# Altium PCB comparator_mezzanine.PcbDoc
Units mil, origin at the board's own origin, x right, y up, seen from the top; angles counter-clockwise.
Board outline 2200 x 2200 mil, 4 copper layers (Top Layer, Signal Layer 1, Signal Layer 2, Bottom Layer), stack 30.634 mil thick; 36 components, 58 nets, 259 pads, 51 vias.
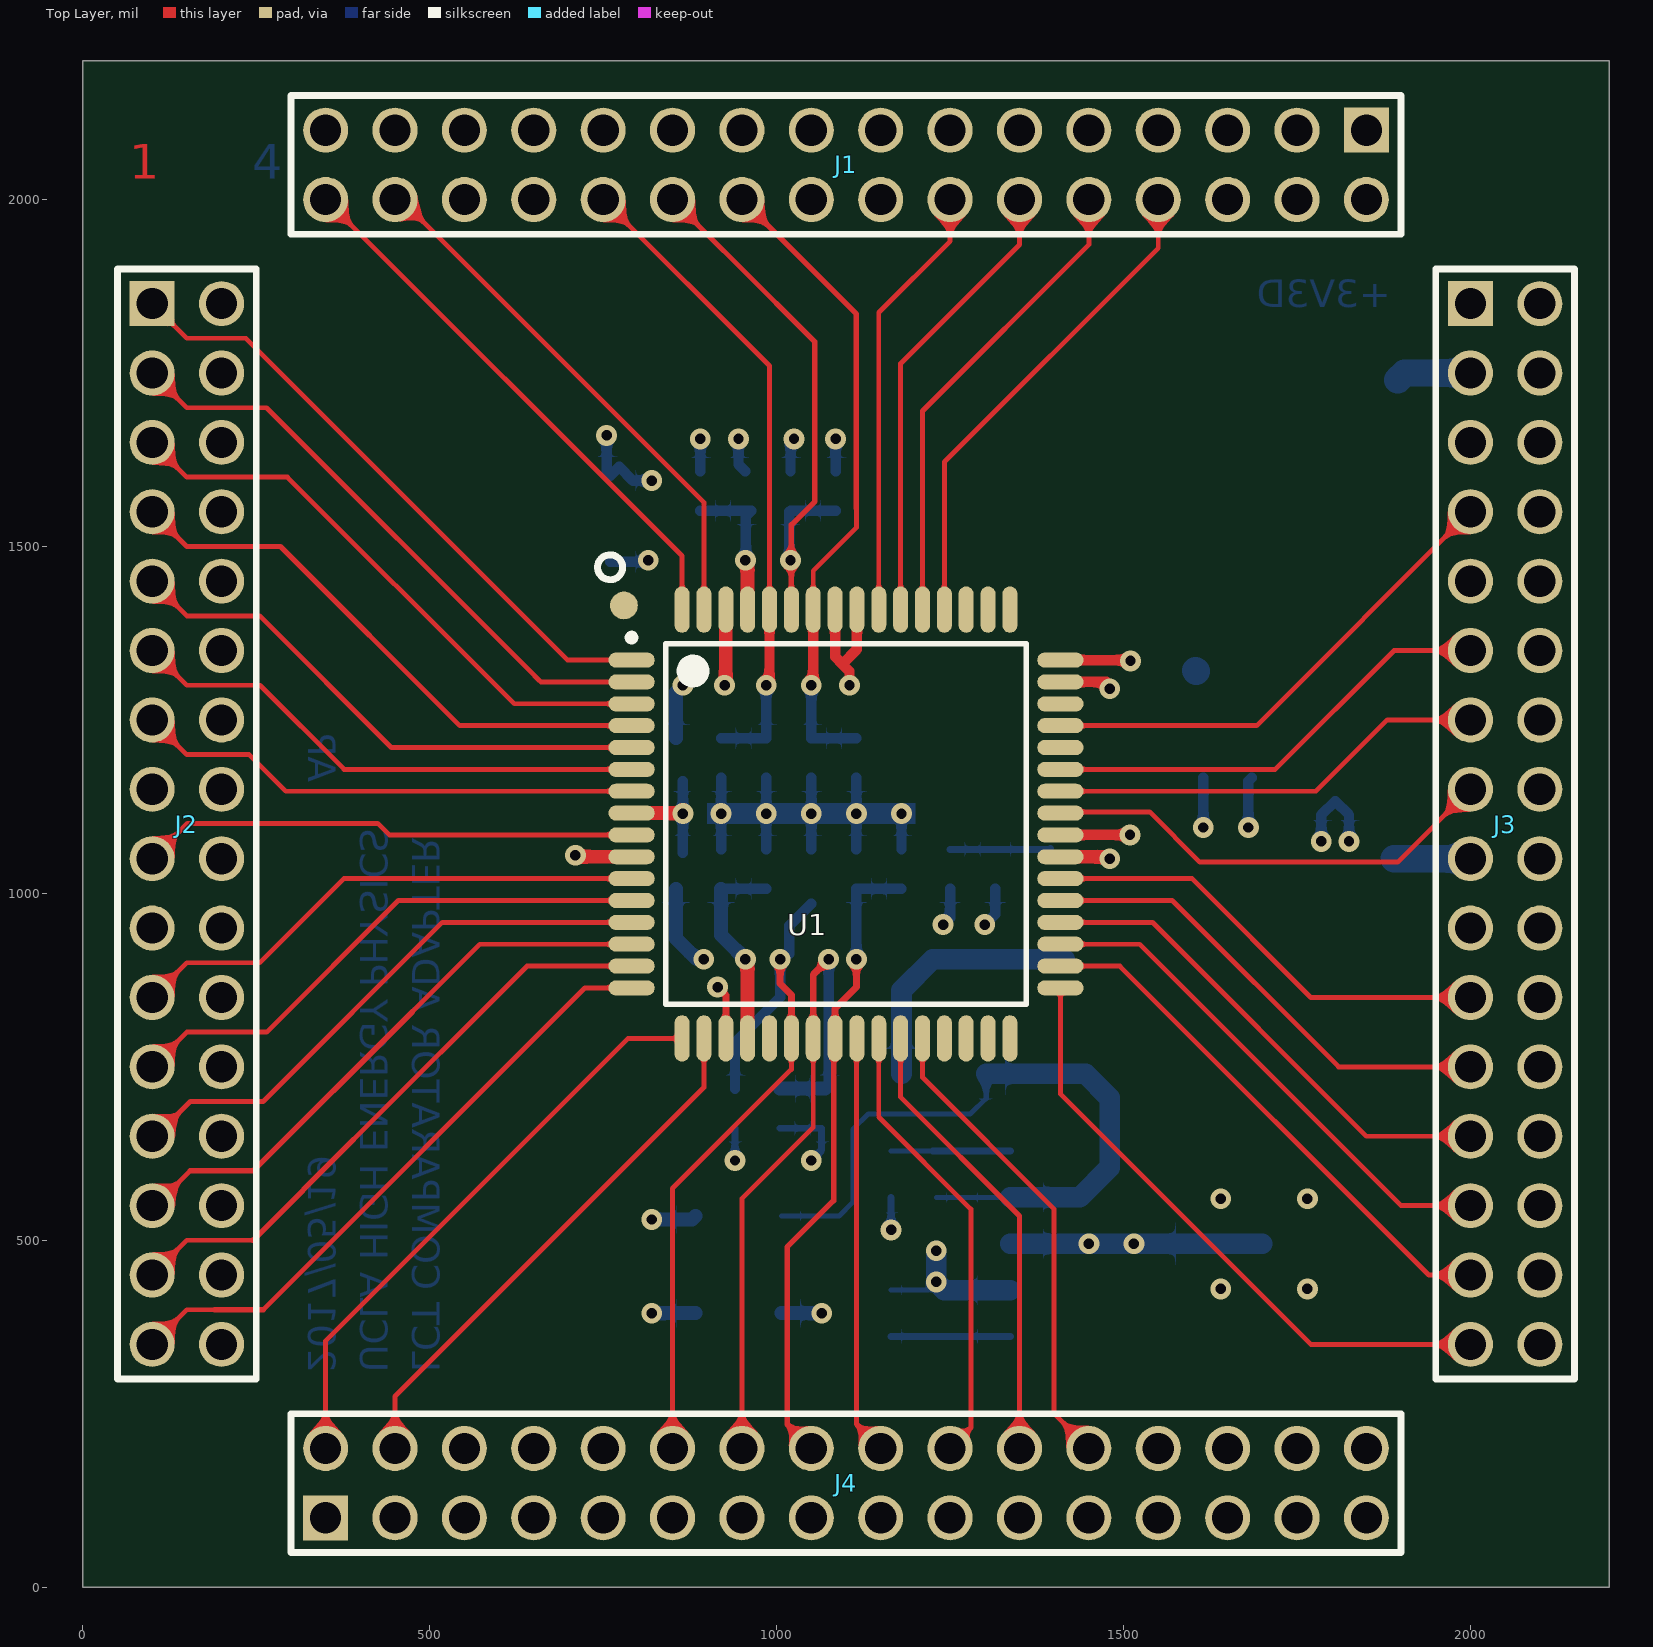
[diagram p0: Top Layer view]
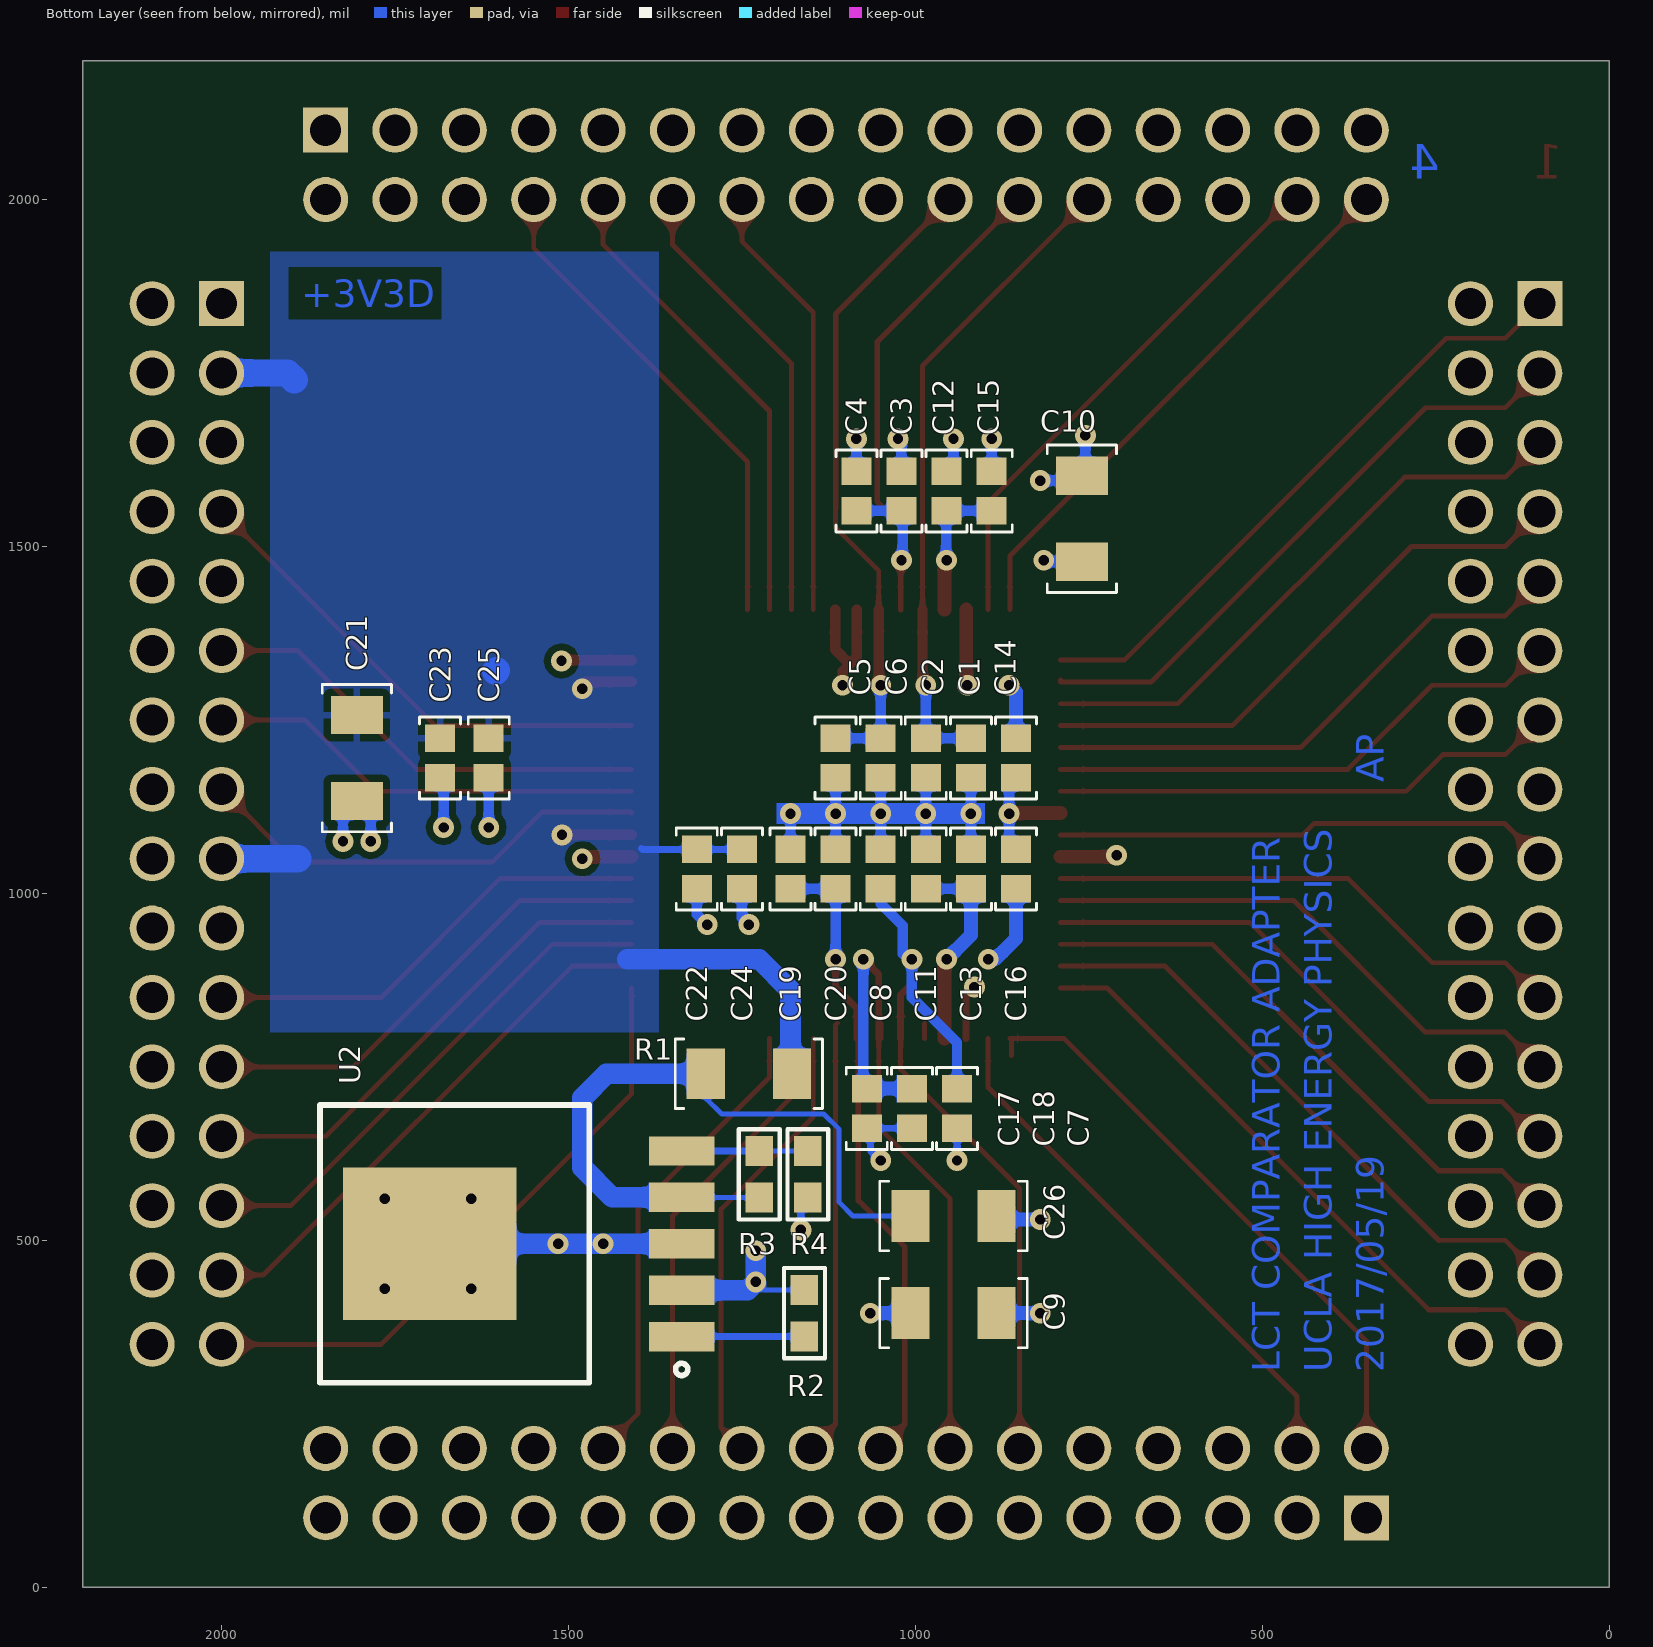
[diagram p1: Bottom Layer view, seen from below]
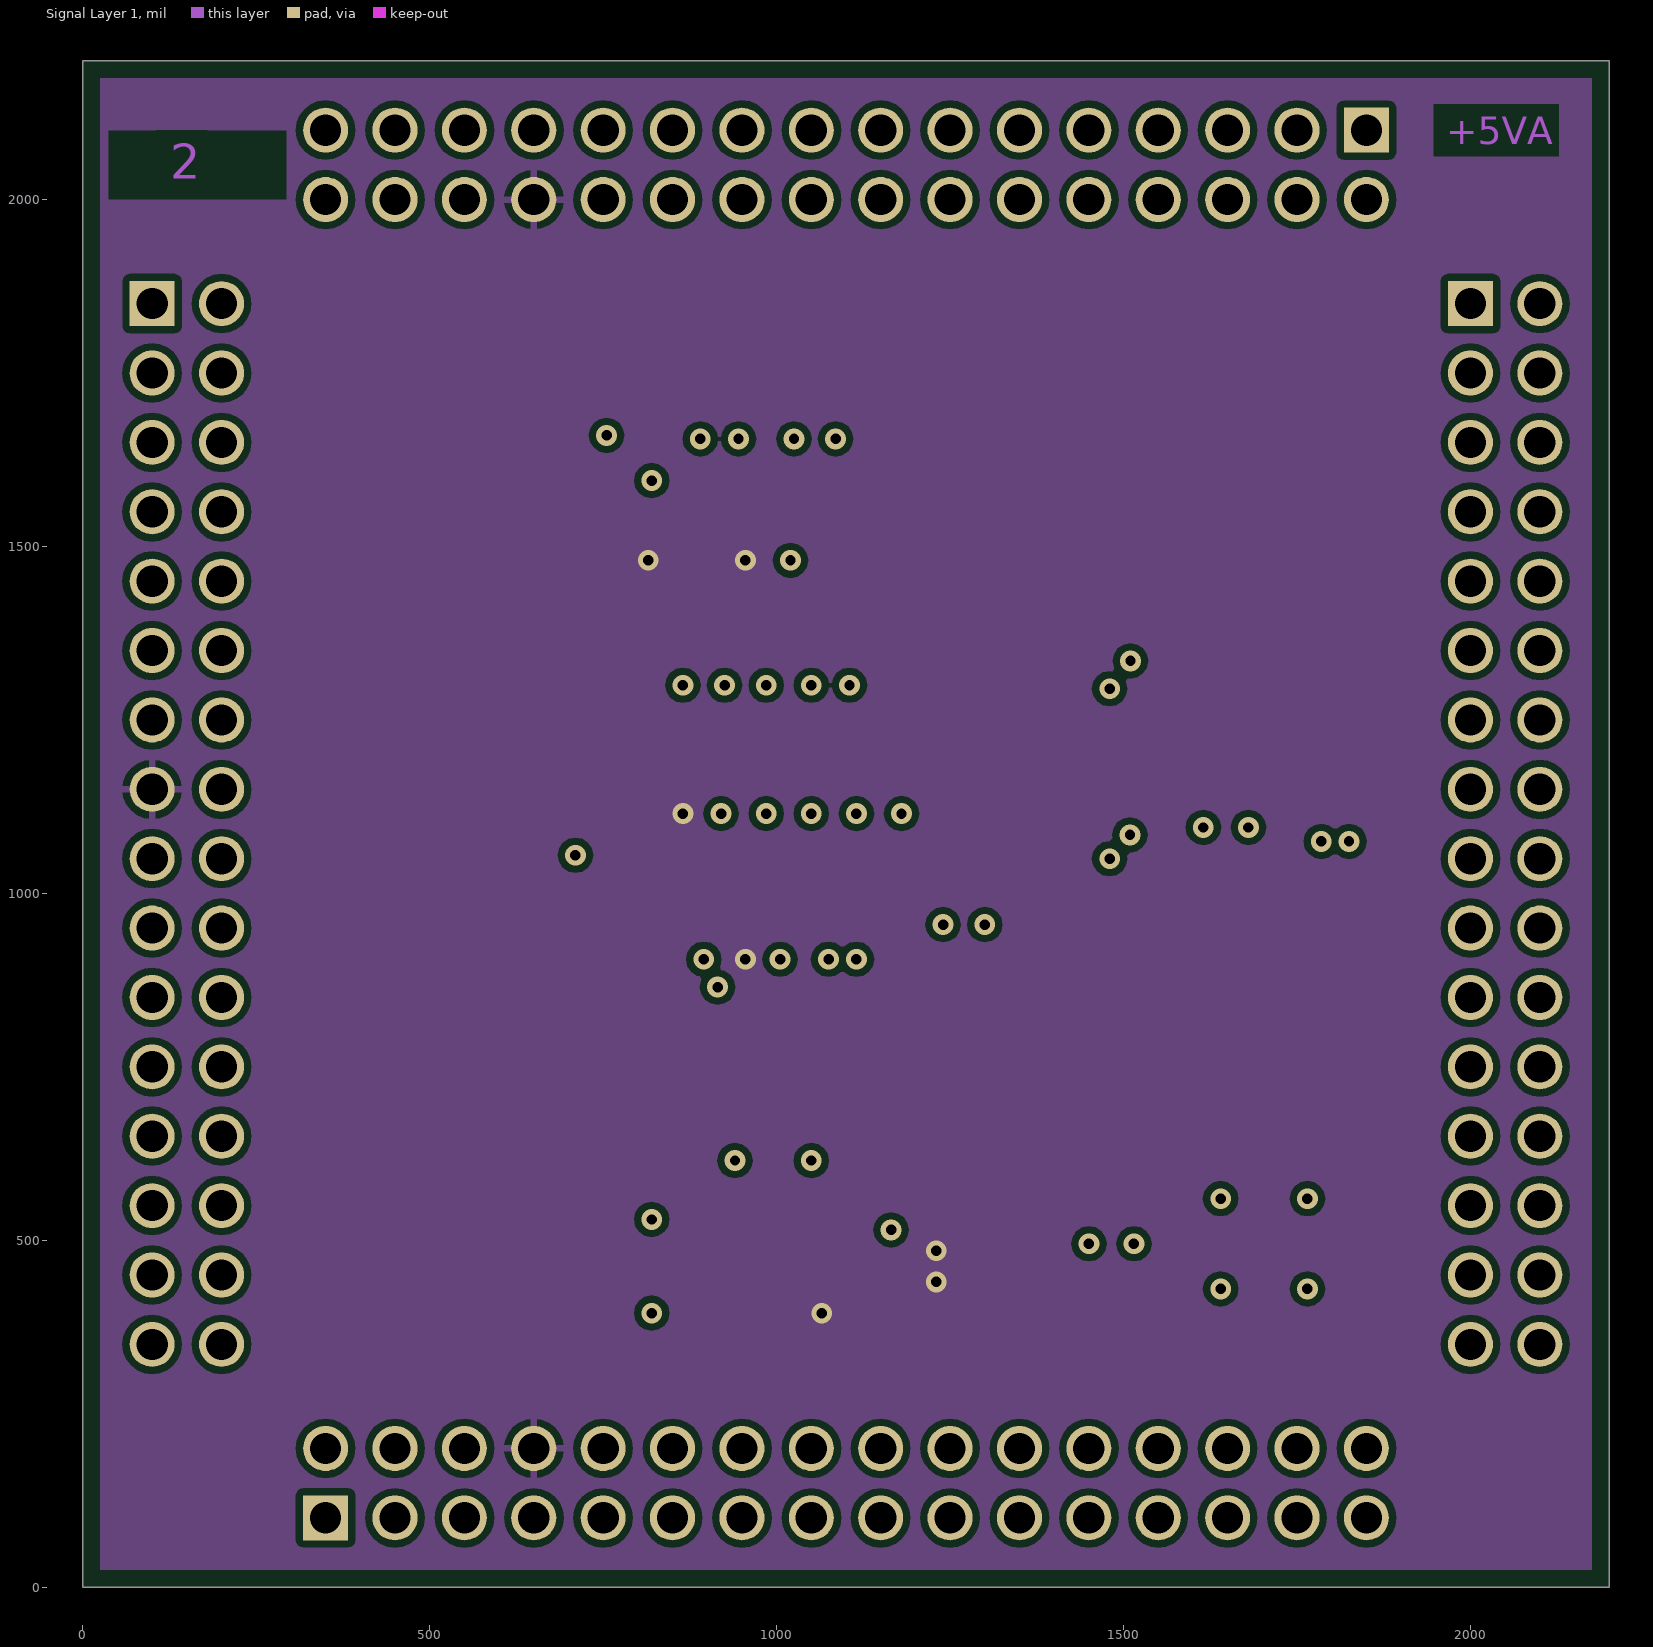
[diagram p2: Signal Layer 1]
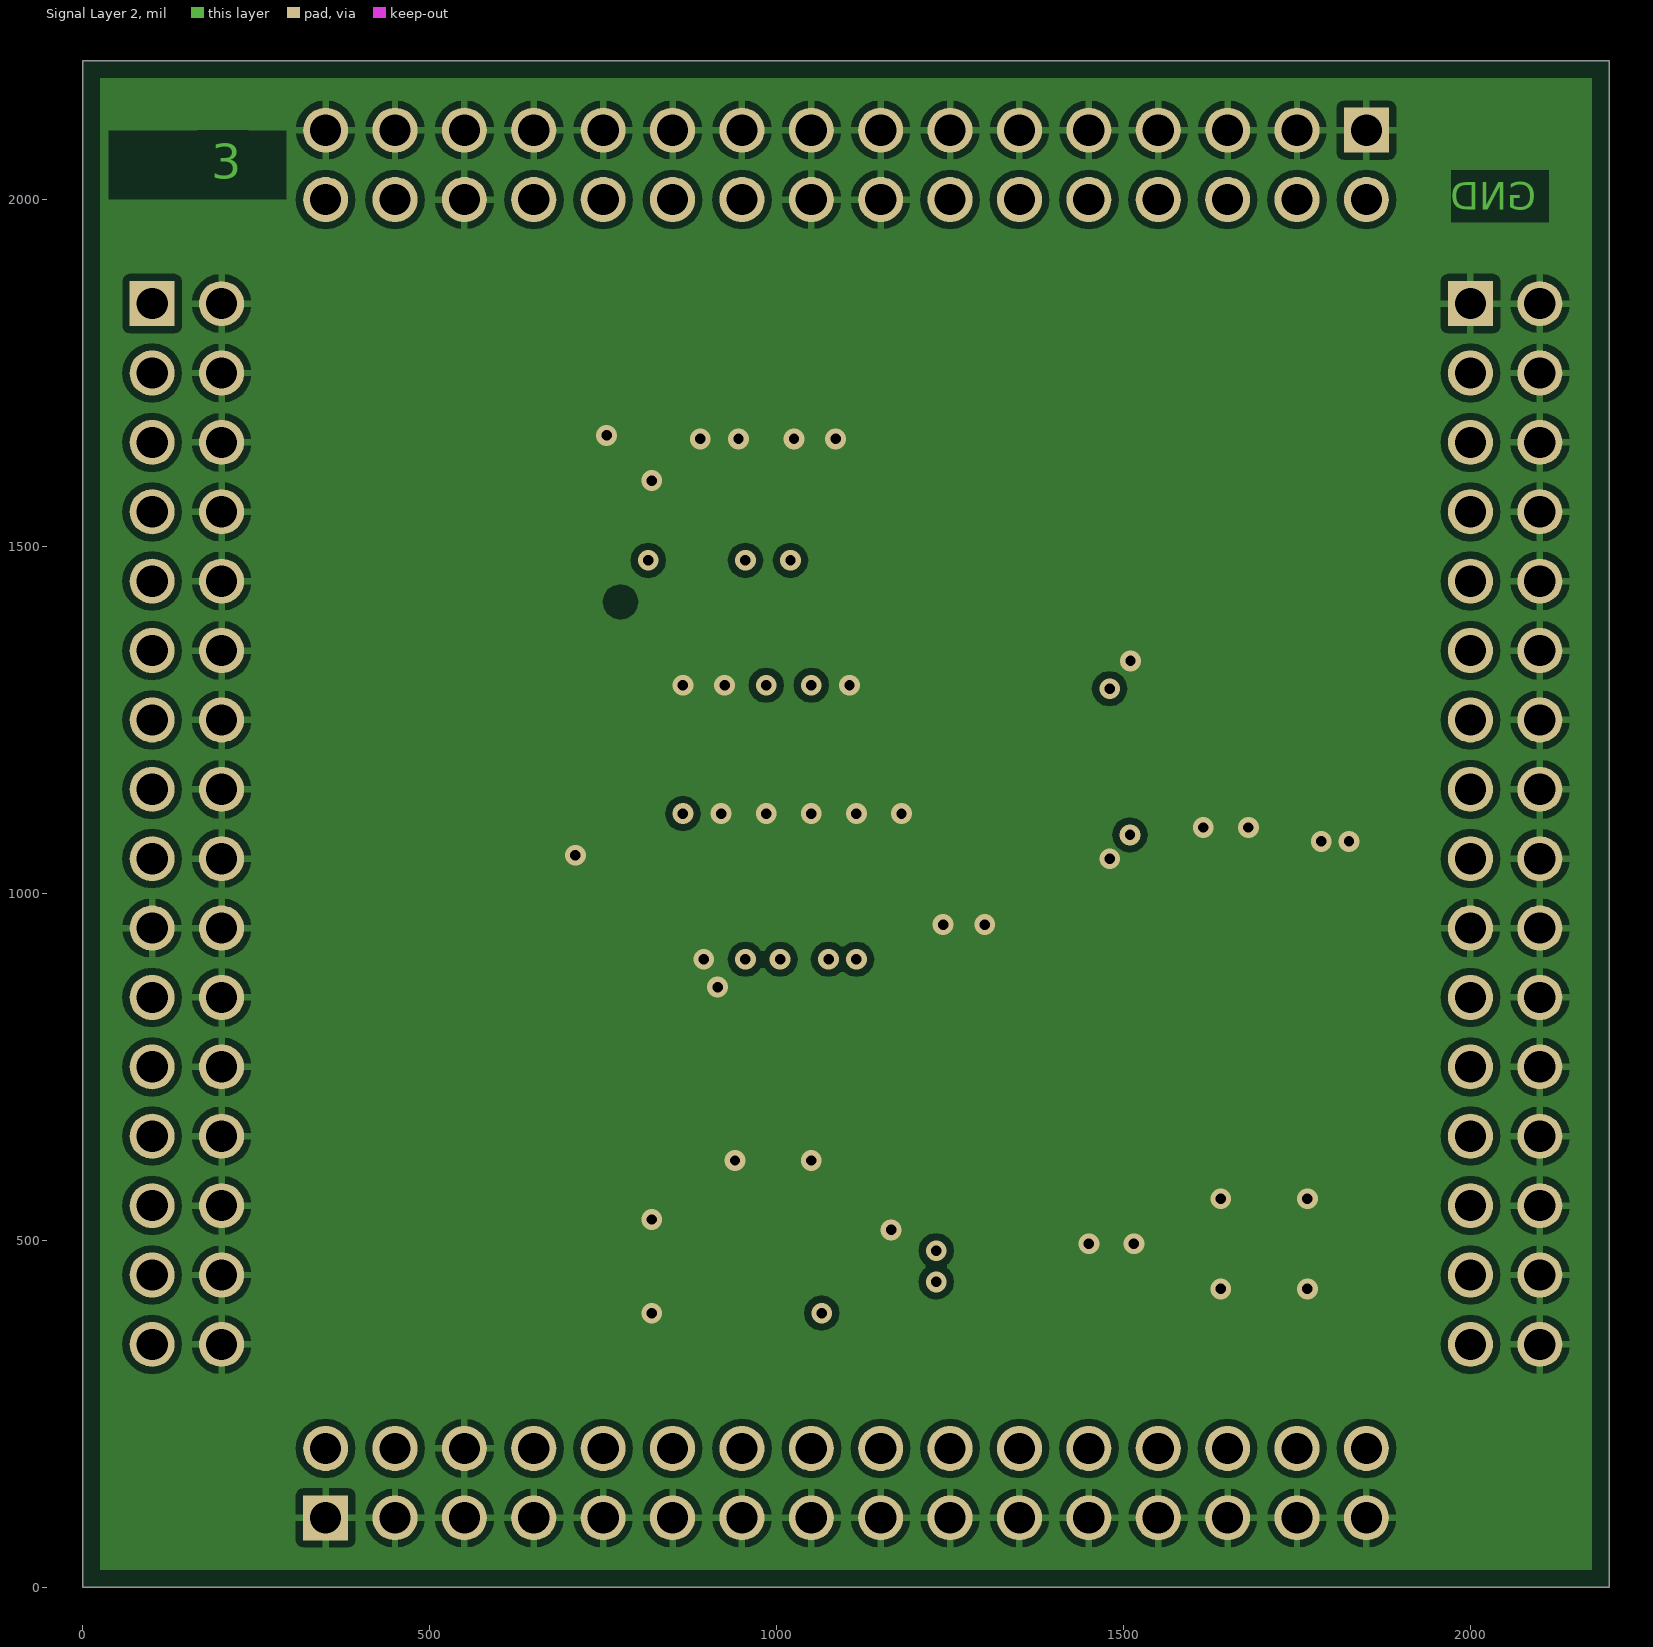
[diagram p3: Signal Layer 2]
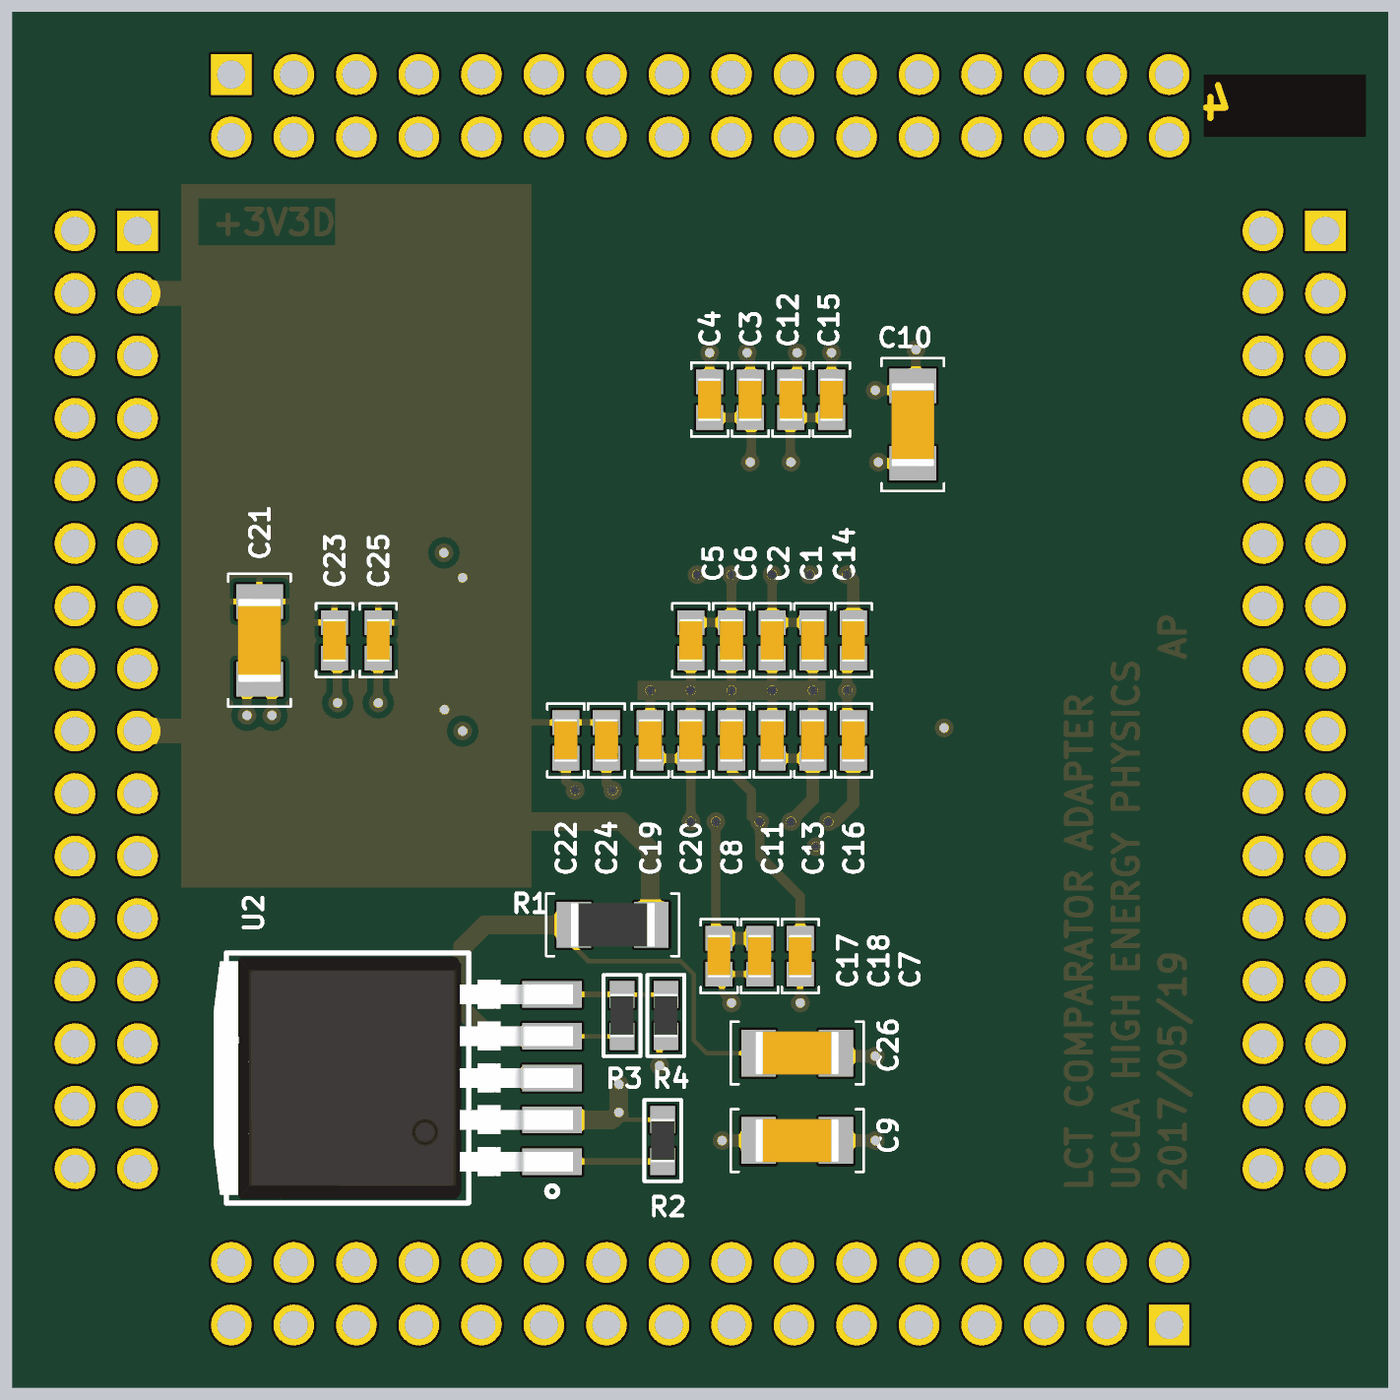
[diagram p4: 3D render of the assembled board from below, using the file's embedded part models]

## Layer stack, top to bottom
Top Solder: solder mask 0.4, Solder Resist, Dk 3.5
Top Layer: signal copper 1.4
Dielectric 1: core 10, FR-4, Dk 4.2
Signal Layer 1: signal copper 1.417
Dielectric 3: prepreg 5, Dk 4.2
Signal Layer 2: signal copper 1.417
Dielectric 2: core 10, Dk 4.2
Bottom Layer: signal copper 1.4
Bottom Solder: solder mask 0.4, Solder Resist, Dk 3.5

## Board outline
0,0 2200,0 2200,2200 0,2200

## Design rules (kind name [scope] priority, off if disabled: settings)
Clearance [All] p1: gap=9.84 ignorepadtopadclearanceinfootprint=FALSE
MinimumAnnularRing [All] p1: minimumring=6
MinimumSolderMaskSliver [All] p1: minsoldermaskwidth=1.5
PolygonConnect ViaConnect [IsVia] p1: connectstyle=Direct reliefconductorwidth=10 reliefentries=4 polygonreliefangle="90 Angle" airgapwidth=10
PolygonConnect [All] p2: connectstyle=Relief reliefconductorwidth=10 reliefentries=4 polygonreliefangle="90 Angle" airgapwidth=10
RoutingVias [All] p1: holewidth=15 width=30 viastyle="Through Hole" minholewidth=15 minwidth=30 maxholewidth=15 maxwidth=30
SilkToSolderMaskClearance [IsPad] p1: minsilkscreentomaskgap=5.91 clearancetoexposedcopper=TRUE
SolderMaskExpansion [All] p1: expansion=4
Width [All] p1: maxlimit=39.37 minlimit=7 preferedwidth=10 midlayer1_minwidth=10 midlayer2_minwidth=10 minimp=50.000000 maximp=50.000000 favimp=50.000000
28 further rules are at their usual default settings.

## Classes and differential pairs
component class comparator_mezzanine: C2 C3 C4 C5 C6 C7 C8 C9 C10 C11 C12 C13 C14 C15 C16 C17 C18 C19 C20 C21 C22 C23 C24 C25 C26 J1 J2 J3 J4 R1 R2 R3 R4 U2

## Components (designator, comment, footprint, x,y, rotation, side; value= is the part's Value field where it differs from the comment)
C1 "1uF" C0603 920,1195 r90 bottom
C2 "0.1uF" C0603 985,1195 r90 bottom
C3 "1uF" C0603 1020,1580 r270 bottom
C4 "0.1uF" C0603 1085,1580 r270 bottom
C5 "1uF" C0603 1115,1195 r90 bottom
C6 "0.1uF" C0603 1050,1195 r90 bottom
C7 "1uF" C0603 940,690 r90 bottom
C8 "0.1uF" C0603 1050,1035 r270 bottom
C9 "10uF" c1206 945,395 r180 bottom
C10 "10uF" c1206 760,1540 r90 bottom
C11 "0.1uF" C0603 985,1035 r270 bottom
C12 "1uF" C0603 955,1580 r270 bottom
C13 "0.1uF" C0603 920,1035 r270 bottom
C14 "1uF" C0603 855,1195 r270 bottom
C15 "0.1uF" C0603 890,1580 r270 bottom
C16 "1uF" C0603 855,1035 r90 bottom
C17 "1uF" C0603 1070,690 r90 bottom
C18 "0.1uF" C0603 1005,690 r90 bottom
C19 "1uF" C0603 1180,1035 r270 bottom
C20 "0.1uF" C0603 1115,1035 r270 bottom
C21 "10uF" c1206 1805,1195 r270 bottom
C22 "0.1uF" C0603 1315,1035 r90 bottom
C23 "1uF" C0603 1685,1195 r90 bottom
C24 "0.1uF" C0603 1250,1035 r90 bottom
C25 "1uF" C0603 1615,1195 r90 bottom
C26 "10uF" c1206 945,535 r180 bottom
J1 "HEADER 16x02" "HEADER 16X02" 1850,2100 r270 top
J2 "HEADER 16x02" "HEADER 16X02" 100,1850 r0 top
J3 "HEADER 16x02" "HEADER 16X02" 2000,1850 r0 top
J4 "HEADER 16x02" "HEADER 16X02" 350,100 r90 top
R1 "Value" R1206 1240,740 r180 bottom
R2 "4.7k" MC_S6/SM/R_0603_IPC 1160,395 r270 bottom
R3 "4.7k" MC_S6/SM/R_0603_IPC 1225,595 r90 bottom
R4 "4.7k" MC_S6/SM/R_0603_IPC 1155,595 r270 bottom
U1 "UCLA/LCT_COMP" "TQFP-64 14x14mm" 1100,1100 r0 top locked
U2 "LP38501ATJ-ADJ" MC_S6/SM/TO263_THIN 1336.81,361.14 r90 bottom

## Footprints (in the part's own frame and the unit in brackets; to place one, negate y for a bottom-side part, rotate by r counter-clockwise, add the part's x,y. Pads: shape width x height; smd on the part's side, far side on the other; paste and mask are expansions set on the pad)
C0603 [mm] "Chip Capacitor, 2-Leads, Body 1.60x0.85mm, IPC Low Density"
  rect 1x1.1 smd: 1(-0.725,0) 2(0.725,0)
  silkscreen extent -1.5,-0.75 1.5,0.75, body extent -0.87,-0.48 0.87,0.48, height 0.55
c1206 [mm] "Chip Capacitor, 2-Leads, Body 3.27x1.60mm, IPC Low Density"
  rect 1.4x1.9 smd: 1(-1.575,0) 2(1.575,0)
  silkscreen extent -2.7,-1.27 2.7,1.27, body extent -1.7,-0.88 1.7,0.87, height 1.75
"HEADER 16X02" [mil]
  rect 65x65 hole 45: 1(0,0)
  round 65 hole 45: 2(100,0) 3(0,-100) 4(100,-100) 5(0,-200) 6(100,-200) 7(0,-300) 8(100,-300) 9(0,-400) 10(100,-400) 11(0,-500) 12(100,-500) 13(0,-600) 14(100,-600) 15(0,-700) 16(100,-700) 17(0,-800) 18(100,-800) 19(0,-900) 20(100,-900) 21(0,-1000) 22(100,-1000) 23(0,-1100) 24(100,-1100) 25(0,-1200) 26(100,-1200) 27(0,-1300) 28(100,-1300) 29(0,-1400) 30(100,-1400) 31(0,-1500) 32(100,-1500)
  silkscreen extent -50,-1550 150,50
MC_S6/SM/R_0603_IPC [mm]
  rect 1.1x1 smd: 1(-0.85,0) 2(0.85,0)
  Top Layer pour cut-out: -1.7,-0.8 1.7,-0.8 1.7,0.8 -1.7,0.8
  silkscreen extent -1.65,-0.75 1.65,0.75, body extent -0.87,-0.47 0.88,0.48, height 0.55
MC_S6/SM/TO263_THIN [mm]
  rect 1.07x2.41 smd: 1(0,0) 2(1.7,0) 3(3.4,0) 4(5.1,0) 5(6.8,0)
  rect 5.59x6.35 smd: 6(3.4,9.225)
  Top Layer pour cut-out: -0.9,-1.6 7.8,-1.6 7.8,1.6 -0.9,1.6
  silkscreen extent -1.68,-0.22 8.48,13.24, body extent -1.51,-0.85 8.31,13.75, height 4.22
R1206 [mm] "Chip Resistor, 2-Leads, Body 3.27x1.60mm, IPC Low Density"
  rect 1.4x1.85 smd: 1(-1.575,0) 2(1.575,0)
  silkscreen extent -2.7,-1.27 2.7,1.27, body extent -1.7,-0.88 1.7,0.87, height 0.7
"TQFP-64 14x14mm" [mm] "TQFP, 64-Leads, Body 14.00x14.00mm, Pitch 0.80mm, IPC Medium Density"
  oval 1.7x0.55 smd: 1(-7.85,6) 2(-7.85,5.2) 3(-7.85,4.4) 4(-7.85,3.6) 5(-7.85,2.8) 6(-7.85,2) 7(-7.85,1.2) 8(-7.85,0.4) 9(-7.85,-0.4) 10(-7.85,-1.2) 11(-7.85,-2) 12(-7.85,-2.8) 13(-7.85,-3.6) 14(-7.85,-4.4) 15(-7.85,-5.2) 16(-7.85,-6) 33(7.85,-6) 34(7.85,-5.2) 35(7.85,-4.4) 36(7.85,-3.6) 37(7.85,-2.8) 38(7.85,-2) 39(7.85,-1.2) 40(7.85,-0.4) 41(7.85,0.4) 42(7.85,1.2) 43(7.85,2) 44(7.85,2.8) 45(7.85,3.6) 46(7.85,4.4) 47(7.85,5.2) 48(7.85,6)
  oval 0.55x1.7 smd: 17(-6,-7.85) 18(-5.2,-7.85) 19(-4.4,-7.85) 20(-3.6,-7.85) 21(-2.8,-7.85) 22(-2,-7.85) 23(-1.2,-7.85) 24(-0.4,-7.85) 25(0.4,-7.85) 26(1.2,-7.85) 27(2,-7.85) 28(2.8,-7.85) 29(3.6,-7.85) 30(4.4,-7.85) 31(5.2,-7.85) 32(6,-7.85) 49(6,7.85) 50(5.2,7.85) 51(4.4,7.85) 52(3.6,7.85) 53(2.8,7.85) 54(2,7.85) 55(1.2,7.85) 56(0.4,7.85) 57(-0.4,7.85) 58(-1.2,7.85) 59(-2,7.85) 60(-2.8,7.85) 61(-3.6,7.85) 62(-4.4,7.85) 63(-5.2,7.85) 64(-6,7.85)
  silkscreen extent -7.97,-6.6 6.6,6.95, body extent -8,-8.03 8,8.03, height 1.2

## Part data
C1 C3 C5 C7 C12 C14 C16 C17 C19 C23 C25: library part Murata/GRM188R61E105KA12D, "CAP2, CER, 1.0uF, 10%, 25V, 0603"
C2 C4 C6 C8 C11 C13 C15 C18 C20 C22 C24: library part CAP/06035C104KAT2A, "CAP-CER, 2, 0.1uF, 10%, 50V, 0603, X7R", Capacitance=0.10µF, Manufacturer="AVX Corporation", Manufacturer Part Number=06035C104KAT2A, Operating Temperature="-55°C ~ 125°C", Package / Case="0603 (1608 Metric)", Ratings=-, Supplier Part Number 1=478-5052-1-ND, Temperature Coefficient=X7R, Tolerance=±10%, Voltage - Rated=50V, Applications="General Purpose", Category=Capacitors, ComponentLink1Description=http://datasheets.avx.com/X7RDielectric.pdf, ComponentLink1URL=http://datasheets.avx.com/X7RDielectric.pdf, Features=-, Height - Seated (Max)=-, Lead Spacing=-, Lead Style=-, Mounting Type="Surface Mount, MLCC", Packaging="Cut Tape (CT)", Pricing 1="1=0.1, 10=0.036, 25=0.0264, 50=0.0198, 100=0.0162, 250=0.01352, 500=0.01156, 1000=0.00908 (USD)", RoHS="RoHS Compliant", Size / Dimension="0.063\" L x 0.032\" W (1.60mm x 0.81mm)", Stock 1=4412408, Supplier 1=Digi-Key, Supplier 2=Newark, Supplier Part Number 2=54K2412, Thickness (Max)="0.035\" (0.90mm)"
C9 C10 C21 C26: library part CAP/GMK316F106ZL-T, "CAP-CER, 2, 10uF, 10%, 35V, 1206", Capacitance=10µF, Manufacturer="Taiyo Yuden", Manufacturer Part Number=GMK316F106ZL-T, Operating Temperature="-30°C ~ 85°C", Package / Case="1206 (3216 Metric)", Ratings=-, Supplier Part Number 1=587-1352-1-ND, Temperature Coefficient="Y5V (F)", Tolerance="-20%, +80%", Voltage - Rated=35V, Applications="General Purpose", Category=Capacitors, ComponentLink1Description=http://ds.yuden.co.jp/TYCOMPAS/ut/detail.do?productNo=GMK316F106ZL-T&fileName=GMK316F106ZL-T_SS&mode=specSheetDownload, ComponentLink1URL=http://ds.yuden.co.jp/TYCOMPAS/ut/detail.do?productNo=GMK316F106ZL-T&fileName=GMK316F106ZL-T_SS&mode=specSheetDownload, Features=-, Height - Seated (Max)=-, Lead Spacing=-, Lead Style=-, Mounting Type="Surface Mount, MLCC", Packaging="Cut Tape (CT)", Pricing 1="1=0.46, 10=0.345, 50=0.2012, 100=0.161, 250=0.115, 500=0.0782, 1000=0.06325 (USD)", RoHS="RoHS Compliant", Size / Dimension="0.126\" L x 0.063\" W (3.20mm x 1.60mm)", Stock 1=249989, Supplier 1=Digi-Key, Thickness (Max)="0.071\" (1.80mm)"
R1: library part "RES SMD Generic 1206", "RES0, SMD 1206"
R2 R3 R4: library part ERJ-3EKF4701V, "RES SMD 4.7K OHM 1% 1/10W 0603", Manufacturer="Panasonic Electronic Components", Operating Temperature="-55°C ~ 155°C", Package / Case="0603 (1608 Metric)", Power (Watts)="0.1W, 1/10W", Supplier Device Package=0603, Supplier Part Number 1=P4.70KHCT-ND, Temperature Coefficient=±100ppm/°C, Tolerance=±1%, Category=Resistors, ComponentLink1Description=http://industrial.panasonic.com/www-cgi/jvcr13pz.cgi?E+PZ+3+AOA0002+ERJ3EKF4701V+7+WW, ComponentLink1URL=http://industrial.panasonic.com/www-cgi/jvcr13pz.cgi?E+PZ+3+AOA0002+ERJ3EKF4701V+7+WW, Composition="Thick Film", Failure Rate=-, Features="Automotive AEC-Q200", Height - Seated (Max)="0.022\" (0.55mm)", Manufacturer Part Number=ERJ-3EKF4701V, Number of Terminations=2, Packaging="Cut Tape (CT)", Part Status=Active, Pricing 1="1=0.1, 50=0.0114, 100=0.0084, 250=0.00644, 500=0.00514, 1000=0.00379 (USD)", Pricing 2="1=0.1, 50=0.0114, 100=0.0084, 250=0.00644, 500=0.00514, 1000=0.00379 (USD)", Resistance (Ohms)=4.7k, RoHS="RoHS Compliant", Size / Dimension="0.063\" L x 0.031\" W (1.60mm x 0.80mm)", Stock 1=998330, Stock 2=998330, Supplier 1=Digi-Key, Supplier 2=Digi-Key, Supplier Part Number 2=P4.70KHDKR-ND
U1: "UCLA LCT Comparator"
U2: Package=000, COMPGROUP=0, COMPROT=0, COMPSIDE=TOP, mfgr=National, mfgr_foot=TO-263-THIN, mfgr_id=LP38501ATJ-ADJ

## Free pads (board coordinates)
  round 40 smd: 3(780,1415)

## Via types
v1: diameter 30, hole 15, Top Layer to Bottom Layer, tented both sides, 51 vias

## Nets (pads, with @x,y where several pads share a name; then routed paths per layer and width w, separated by ;. In a path a pad name is that pad's centre, name@x,y a point inside that pad or via, vN(x,y) a via of type N, cw(c..) or ccw(c..) an arc to the next point about the centre after c; other vN are vias at no path point)
+3V3D: C21.1 C22.2 C23.2 C24.2 C25.2 J3.3 J3.17 R1.2 U1.40 U1.47 | length 914.5
  Top Layer w15: U1.40 v1(1509.25,1084.25) v1@1510,1085 ; U1.47 1475.28,1304.72 v1@1480,1300
  Bottom Layer w10: C24.2 C22.2 1393.54,1063.54 1395,1065
  Bottom Layer w15: J3.3@1995,1750 J3.3
  Bottom Layer w30: R1.2@1180,740 1180,860 1225,905 1415,905
  Bottom Layer w39.37: 1603.64,1321.36 1605,1320 ; 1890,1050 J3.17 ; 1895,1740 1905,1750 J3.3@1995,1750
  other v1: 1480,1295
+5VA: C9.1 C10.1 C11.2 C12.2 C13.2 C14.2 C15.2 C16.2 J1.26 J2.15 J4.8 R2.1 U1.8 U1.20 U1.61 U2.2 | length 1036
  Top Layer w20: U1.8 860.75,1115.75 v1@865,1120 ; v1(955,905) 958.27,901.73 U1.20 ; v1(955,1480) 958.27,1476.73 U1.61
  Bottom Layer w7: R2.1@1165,428.46 1218.46,428.46 v1(1230,440)
  Bottom Layer w15: C10.1 812.99,1477.99 v1(815,1480) ; C16.2@865,1058.54 C14.2@865,1161.46 ; C15.2 C12.2 963.54,1551.46 955.78,1543.7 v1@955.78,1480 ; C13.2 C11.2
  Bottom Layer w20: C13.2 920,940 v1(955,905) ; C9.1 v1(1065,395)
  Bottom Layer w30: v1(1230,485) v1(1230,440) 1241.93,428.07 U2.2
  other v1: 865,1115
COMPIN: J1.12 U1.54 | length 661.9
  Top Layer w7: U1.54 1178.74,1763.74 1350,1935 J1.12
COMPOUT: J4.18 U1.25 | length 628.5
  Top Layer w7: U1.25@1112.42,812.91 1115,810.33 1115,235 J4.18
DISTRIP0: J3.7 U1.45 | length 718.6
  Top Layer w7: U1.45 1691.73,1241.73 J3.7
DISTRIP1: J3.11 U1.43 | length 661.9
  Top Layer w7: U1.43 1718.74,1178.74 1890,1350 J3.11
DISTRIP2: J3.13 U1.42 | length 633.5
  Top Layer w7: U1.42 1777.24,1147.24 1880,1250 J3.13
DISTRIP3: J3.15 U1.41 | length 666.2
  Top Layer w7: U1.41 1409.06,1117.5 1537.5,1117.5 1610,1045 1895,1045 J3.15
DISTRIP4: J3.21 U1.38 | length 661.9
  Top Layer w7: U1.38 1598.74,1021.26 1770,850 J3.21
DISTRIP5: J3.23 U1.37 | length 690.3
  Top Layer w7: U1.37 1570.24,989.76 1810,750 J3.23
DISTRIP6: J3.25 U1.36 | length 718.6
  Top Layer w7: U1.36 1541.73,958.27 1850,650 J3.25
DISTRIP7: J3.27 U1.35 | length 747
  Top Layer w7: U1.35 1523.23,926.77 1900,550 J3.27
EN33: R2.2 U2.1 | length 172
  Bottom Layer w10: R2.2@1165,361.54 1336.42,361.54 U2.1
FB33: R3.2 R4.1 U2.5 | length 172
  Bottom Layer w7: R4.1@1165,628.46 R3.2
  Bottom Layer w10: R3.2 1225.39,628.86 U2.5
GND: C1.1 C2.1 C3.1 C4.1 C5.1 C6.1 C7.1 C8.1 C9.2 C10.2 C11.1 C12.1 C13.1 C14.1 C15.1 C16.1 C17.1 C18.1 C19.1 C20.1 C21.2 C22.1 C23.1 C24.1 C25.1 C26.2 J1.1 J1.3 J1.5 J1.7 J1.9 J1.11 J1.13 J1.15 J1.16 J1.17 J1.18 J1.19 J1.21 J1.23 J1.25 J1.27 J1.28 J1.29 J1.31 J2.2 J2.4 J2.6 J2.8 J2.10 J2.12 J2.14 J2.16 J2.18 J2.19 J2.20 J2.22 J2.24 J2.26 J2.28 J2.30 J2.32 J3.1 J3.2 J3.4 J3.6 J3.8 J3.10 J3.12 J3.14 J3.16 J3.18 J3.19 J3.20 J3.22 J3.24 J3.26 J3.28 J3.30 J3.32 J4.1 J4.3 J4.5 J4.6 J4.7 J4.9 J4.11 J4.13 J4.15 J4.17 J4.19 J4.21 J4.23 J4.25 J4.27 J4.29 J4.31 R4.2 U1.10 U1.19 U1.39 U1.48 U1.56 U1.57 U1.62 U2.3 U2.6 | length 2735.3
  Top Layer w10: v1(915,865) 926.77,853.23 U1.19
  Top Layer w15: U1.57 1084.25,1340.75 1094.63,1330.37 ; v1(1105,1300) 1105,1320 1094.63,1330.37 ; U1.56 1115.75,1351.5 1094.63,1330.37 ; U1.48 1508.78,1336.22 v1(1510,1335)
  Top Layer w20: v1(710,1055) 712.24,1052.76 U1.10 ; v1(915,865) v1@920,865 ; v1(925,1300) 926.77,1301.77 U1.62 ; U1.39 1477.24,1052.76 v1(1480,1050)
  Bottom Layer w10: v1(940,615) C7.1 ; C18.1 1065,661.46 1065,630 v1(1050,615) ; v1(1165,515) R4.2@1165,561.54
  Bottom Layer w15: v1(755,1660) 755,1607.01 C10.2 772.99,1615 792.99,1595 v1(820,1595) ; C15.1 v1(890,1655) ; C13.1 v1(920,1115) C1.1 ; v1(945,1655) 945,1618.54 C12.1 ; C11.1 v1(985,1115) C2.1 ; C3.1 1020,1650 v1(1025,1655) ; C8.1 v1(1050,1115) C6.1 ; C4.1 v1(1085,1655) ; C20.1 v1(1115,1115) C5.1 ; C19.1 v1(1180,1115) ; v1(1240,955) 1250,965 C24.1 ; v1(1300,955) 1315,970 C22.1 ; v1(1615,1095) C25.1 ; v1(1680,1095) 1680,1161.46 C23.1 ; v1(1785,1075) 1785,1112.99 C21.2 1825,1112.99 v1(1825,1075)
  Bottom Layer w20: v1(820,395) C9.2 ; v1(820,530) 877.99,530 C26.2 ; C16.1 855,935 885,905 v1(895,905) ; C14.1 855,1290 v1(865,1300)
  Bottom Layer w30: U2.3 U2.6
  other v1: 1640,430 1765,430 1450,495 1515,495 1640,560 1765,560
IAMP: C17.2 C18.2 J4.14 U1.23 | length 1025.2
  Top Layer w7: J4.14 950,560 1052.76,662.76 U1.23 ; U1.23@1049.71,790.94 U1.23@1049.71,812.91
  Top Layer w10: U1.23 1052.76,882.76 v1(1075,905)
  Bottom Layer w15: C17.2@1075,723.54 v1(1075,905)
  Bottom Layer w20: C18.2 C17.2
IBIAS: C3.2 C4.2 J1.22 U1.59 | length 826.9
  Top Layer w7: J1.22 1000.28,1849.72
  Top Layer w7.87: 1000.28,1849.72 1055,1795 1055,1565 1021.26,1531.26 U1.59
  Bottom Layer w15: v1@1018.49,1480 1018.49,1549.95 C3.2 C4.2
  other v1: 1020,1480
IFAMP: C7.2 C8.2 J4.12 U1.22 | length 1081.2
  Top Layer w7: J4.12 850,575 1021.26,746.26 U1.22
  Top Layer w10: v1(1005,905) 1005,870 1021.26,853.74 U1.22
  Bottom Layer w15: C7.2 940,785 1005,850 v1(1005,905) ; 1018.49,912.91 1018.49,953.49 1050,985
IN0: J1.30 U1.63 | length 780.7
  Top Layer w7: J1.30 458.99,2000 895.28,1563.72 U1.63
IN1: J1.32 U1.64 | length 803.8
  Top Layer w7: J1.32 863.78,1486.22 U1.64
IN2: J2.1 U1.1 | length 903.8
  Top Layer w7: J2.1 150,1800 235,1800 698.78,1336.22 U1.1
IN3: J2.3 U1.2 | length 878
  Top Layer w7: J2.3 150,1700 264.84,1700 643.48,1321.36 657.52,1307.32 660.12,1304.72 U1.2 U1.2@790.94,1307.32
IN4: J2.5 U1.3 | length 847
  Top Layer w7: J2.5 150,1600 295,1600 605.13,1289.87 621.77,1273.23 U1.3
IN5: J2.7 U1.4 | length 818.6
  Top Layer w7: J2.7 150,1500 285,1500 543.27,1241.73 U1.4
IN6: J2.9 U1.5 | length 790.3
  Top Layer w7: J2.9 150,1400 255,1400 444.76,1210.24 U1.5
IN7: J2.11 U1.6 | length 761.9
  Top Layer w7: J2.11 150,1300 255.38,1300 376.64,1178.74 U1.6
IN8: J2.13 U1.7 | length 733.5
  Top Layer w7: J2.13 150,1200 240,1200 292.76,1147.24 U1.7
IN9: J2.17 U1.9 | length 718.9
  Top Layer w7: J2.17 150.89,1100.89 425,1100.89 441.64,1084.25 U1.9
IN10: J2.21 U1.11 | length 761.9
  Top Layer w7: J2.21 150,900 255,900 376.26,1021.26 U1.11
IN11: J2.23 U1.12 | length 790.3
  Top Layer w7: J2.23 150,800 265,800 454.76,989.76 U1.12
IN12: J2.25 U1.13 | length 818.6
  Top Layer w7: J2.25 105,650 155,700 260,700 518.27,958.27 U1.13
IN13: J2.27 U1.14 | length 847
  Top Layer w7: J2.27 105,550 155,600 ; 475,829.41 572.37,926.77 U1.14
  Top Layer w7.87: 155,600 245.59,600 475,829.41
IN14: J2.29 U1.15 | length 875.4
  Top Layer w7: J2.29 150,500 245,500 ; 390,645 640.28,895.28 U1.15
  Top Layer w7.87: 245,500 390,645
IN15: J2.31 U1.16 | length 903.8
  Top Layer w7: J2.31 150,400 190,400 ; 260,400 723.78,863.78 U1.16
  Top Layer w7.87: 190,400 260,400
IN16: J4.2 U1.17 | length 873.7
  Top Layer w7: J4.2 350,355 785.94,790.94 U1.17@861.57,790.94 ; U1.17@861.57,766.57 U1.17@861.57,790.94 ; U1.17 U1.17@861.57,790.94
IN17: J4.4 U1.18 | length 775.4
  Top Layer w7: J4.4 450,275 895.28,720.28 U1.18
IOFF: C5.2 C6.2 J1.20 U1.58 | length 936.8
  Top Layer w7: U1.58 1052.76,1465 1115,1527.24 1115,1555
  Top Layer w7.87: J1.20 1115,1835 1115,1555
  Top Layer w15: v1(1050,1300) 1052.76,1302.76 U1.58
  Bottom Layer w15: v1@1049.71,1300 1050,1299.71 C6.2 C5.2
LCT_CLK: J1.8 U1.52 | length 718.6
  Top Layer w7: U1.52 1241.73,1621.73 1550,1930 J1.8
LCT_RST: J1.10 U1.53 | length 690.3
  Top Layer w7: U1.53 1210.24,1695.24 1450,1935 J1.10
NC1: U1.21 | length 22
  Top Layer w7: U1.21@987,790.94 U1.21@987,812.91
NC2: U1.29
NC3: U1.30
NC4: U1.31
NC5: U1.32
NC6: U1.44
NC7: U1.46
NC8: U1.49
NC9: U1.50
NC10: U1.51
NetC26_1: C26.1 R1.1 R3.1 U2.4 | length 1022.4
  Bottom Layer w7: C26.1 1090,535 1110,555 1110,660 1132.01,682.01 1279.02,682.01 1302.01,705 R1.1 ; R3.1@1230,561.54 1336.42,561.54 U2.4
  Bottom Layer w30: R1.1 1445,740 1480,705 1480,605 1436.93,561.93 U2.4
OUT0001: J1.14 U1.55 | length 633.5
  Top Layer w7: U1.55 1147.24,1837.24 1250,1940 J1.14
PKMODE0: J3.29 U1.34 | length 775.4
  Top Layer w7: U1.34 1494.72,895.28 1940,450 J3.29
PKMODE1: J3.31 U1.33 | length 893.3
  Top Layer w7: U1.33 1409.06,710.94 1770,350 J3.31
PKTIME0: J4.20 U1.26 | length 658.4
  Top Layer w7: U1.26 1147.24,677.76 1280,545 1280,230 J4.20
PKTIME1: J4.22 U1.27 | length 683.9
  Top Layer w7: U1.27@1175.13,790.94 U1.27@1175.13,812.91 ; U1.27 1178.74,706.26 1350,535 J4.22
PKTIME2: J4.24 U1.28 | length 690.3
  Top Layer w7: U1.28 1210.24,734.76 1400,545 1400,250 J4.24
VREF: C19.2 C20.2 J4.16 U1.24 | length 927.4
  Top Layer w7.87: J4.16 1015,235 1015,490 1082.06,557.06 1082.06,788.76 U1.24
  Top Layer w10: U1.24 1084.25,834.25 1115,865 v1(1115,905)
  Bottom Layer w15: v1(1115,905) C20.2 C19.2
VTHRESH: C1.2 C2.2 J1.24 U1.60 | length 942.7
  Top Layer w7: J1.24 989.76,1760.24 U1.60
  Top Layer w15: v1(985,1300) 989.76,1304.76 U1.60
  Bottom Layer w15: C1.2 C2.2 v1(985,1300)
pads on no net: J1.2 J1.4 J1.6 J3.5 J3.9 J4.10 J4.26 J4.28 J4.30 J4.32

## Polygon pours and split planes (outlines as drawn)
+3V3D on Bottom Layer "+3V3D_L04_P002" (solid, remove dead copper, pour order 2): 1370,800 1930,800 1930,1925 1370,1925 1370,1455
+5VA on Signal Layer 1 "+5VA_L02_P000" (solid, remove dead copper, pour order 0): 25,25 2175,25 2175,2175 25,2175
GND on Signal Layer 2 "GND_L03_P004" (solid, remove dead copper, pour order 4): 25,25 2175,25 2175,2175 25,2175

## Other copper
Top Layer:
  pour cut-out: 37.36,2098.9 37.36,2000.47 293.27,2000.47 293.27,2098.9
  text "1" at 66.89,2030 h50
Signal Layer 1:
  pour cut-out: 37.36,2098.9 37.36,2000.47 293.27,2000.47 293.27,2098.9
  text "+5VA" at 1965,2080 h39.37
  text "2" at 125.94,2030 h50
Signal Layer 2:
  pour cut-out: 37.36,2098.9 37.36,2000.47 293.27,2000.47 293.27,2098.9
  text "3" at 185,2030 h50
  text "GND" at 2095,1985 h39.37
Bottom Layer:
  rectangle net GND: 900,1100 1200,1130
  pour cut-out: 37.36,2098.9 37.36,2000.47 293.27,2000.47 293.27,2098.9
  text "4" at 244.06,2030 h50
  text "+3V3D" at 1885,1845 h39.37
  text "AP" at 325,1160 h39.37 r270
  text "2017/05/19" at 325,310 h39.37 r270
  text "UCLA HIGH ENERGY PHYSICS" at 400,310 h39.37 r270
  text "LCT COMPARATOR ADAPTER" at 475,310 h39.37 r270

## Silkscreen, mask and mechanical layers (free items; w line width, h text height)
Top Overlay:
  circle w10: c760,1470 r18.03
Top Solder:
  rectangle: 35,1995 295,2100
Bottom Solder:
  rectangle: 35,2000 295,2100
Mechanical 1:
  the board outline again, w3.94
Mechanical 2:
  the board outline again, w7.87